# EAGLE board CapstonePCB_Board (EAGLE 9.6.2)
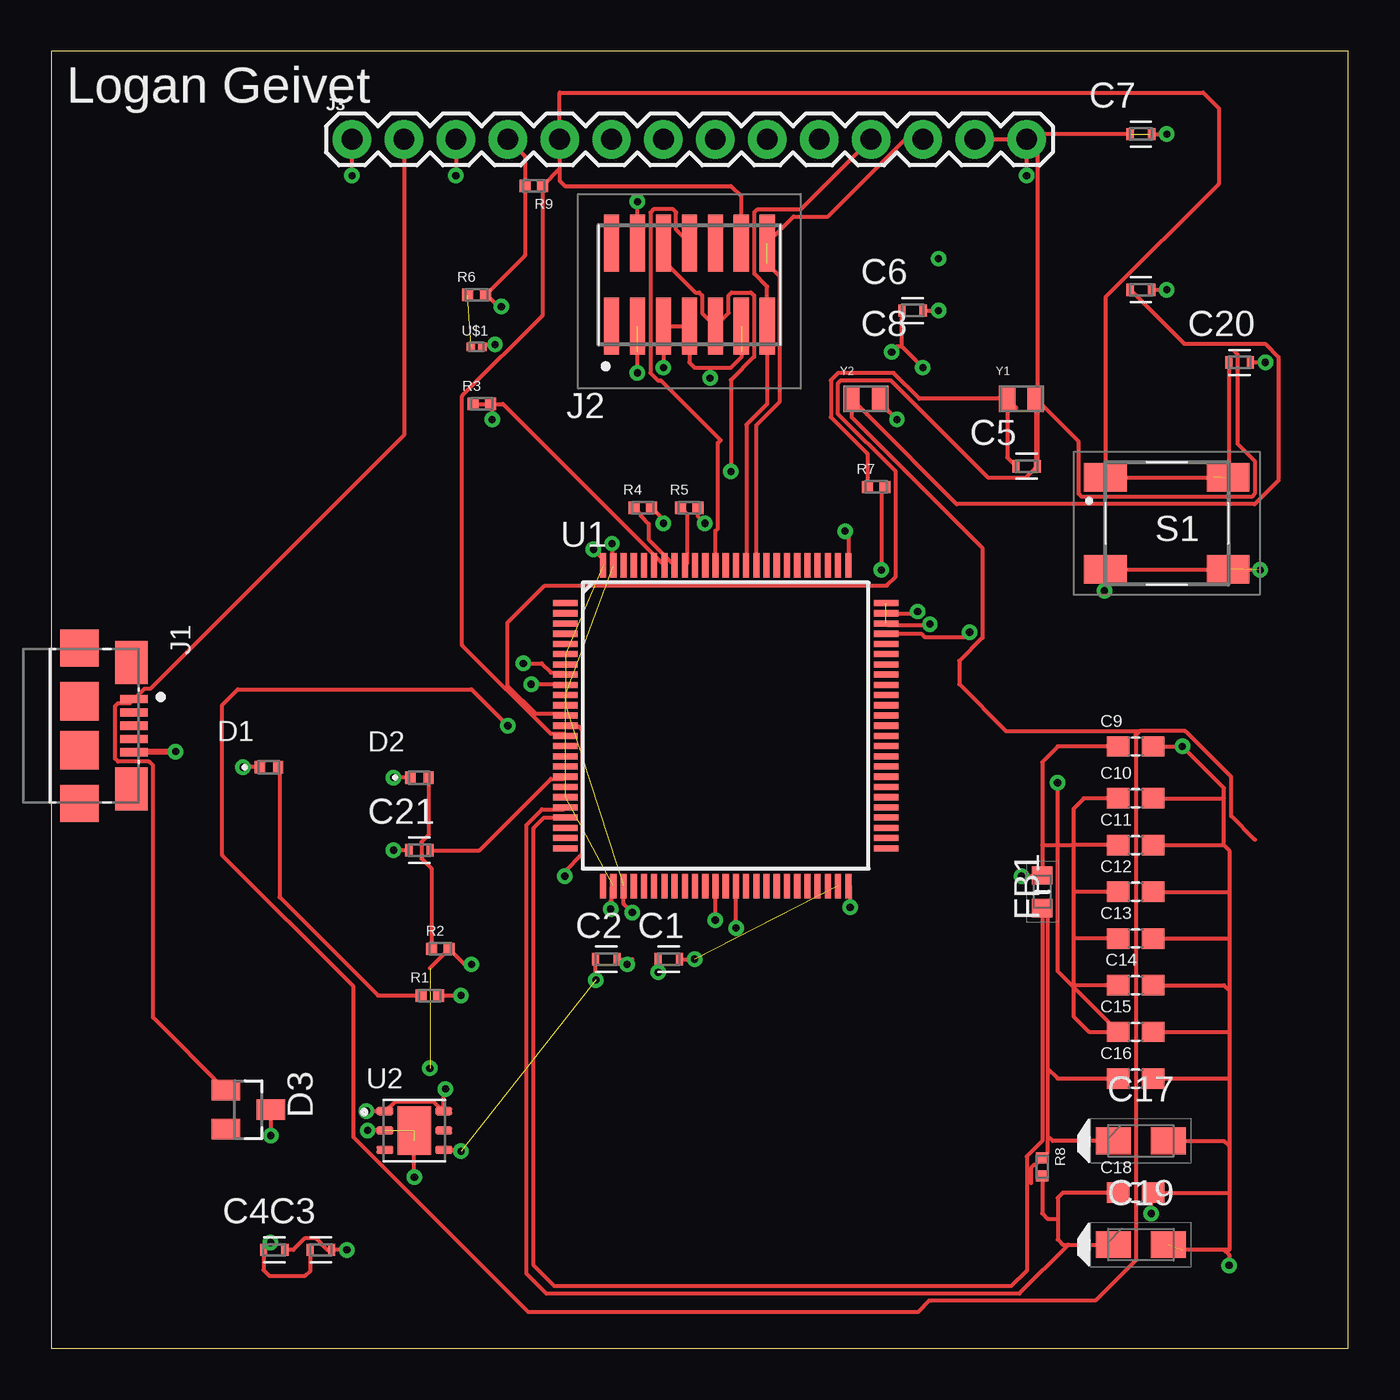
[diagram p0: board, top side]
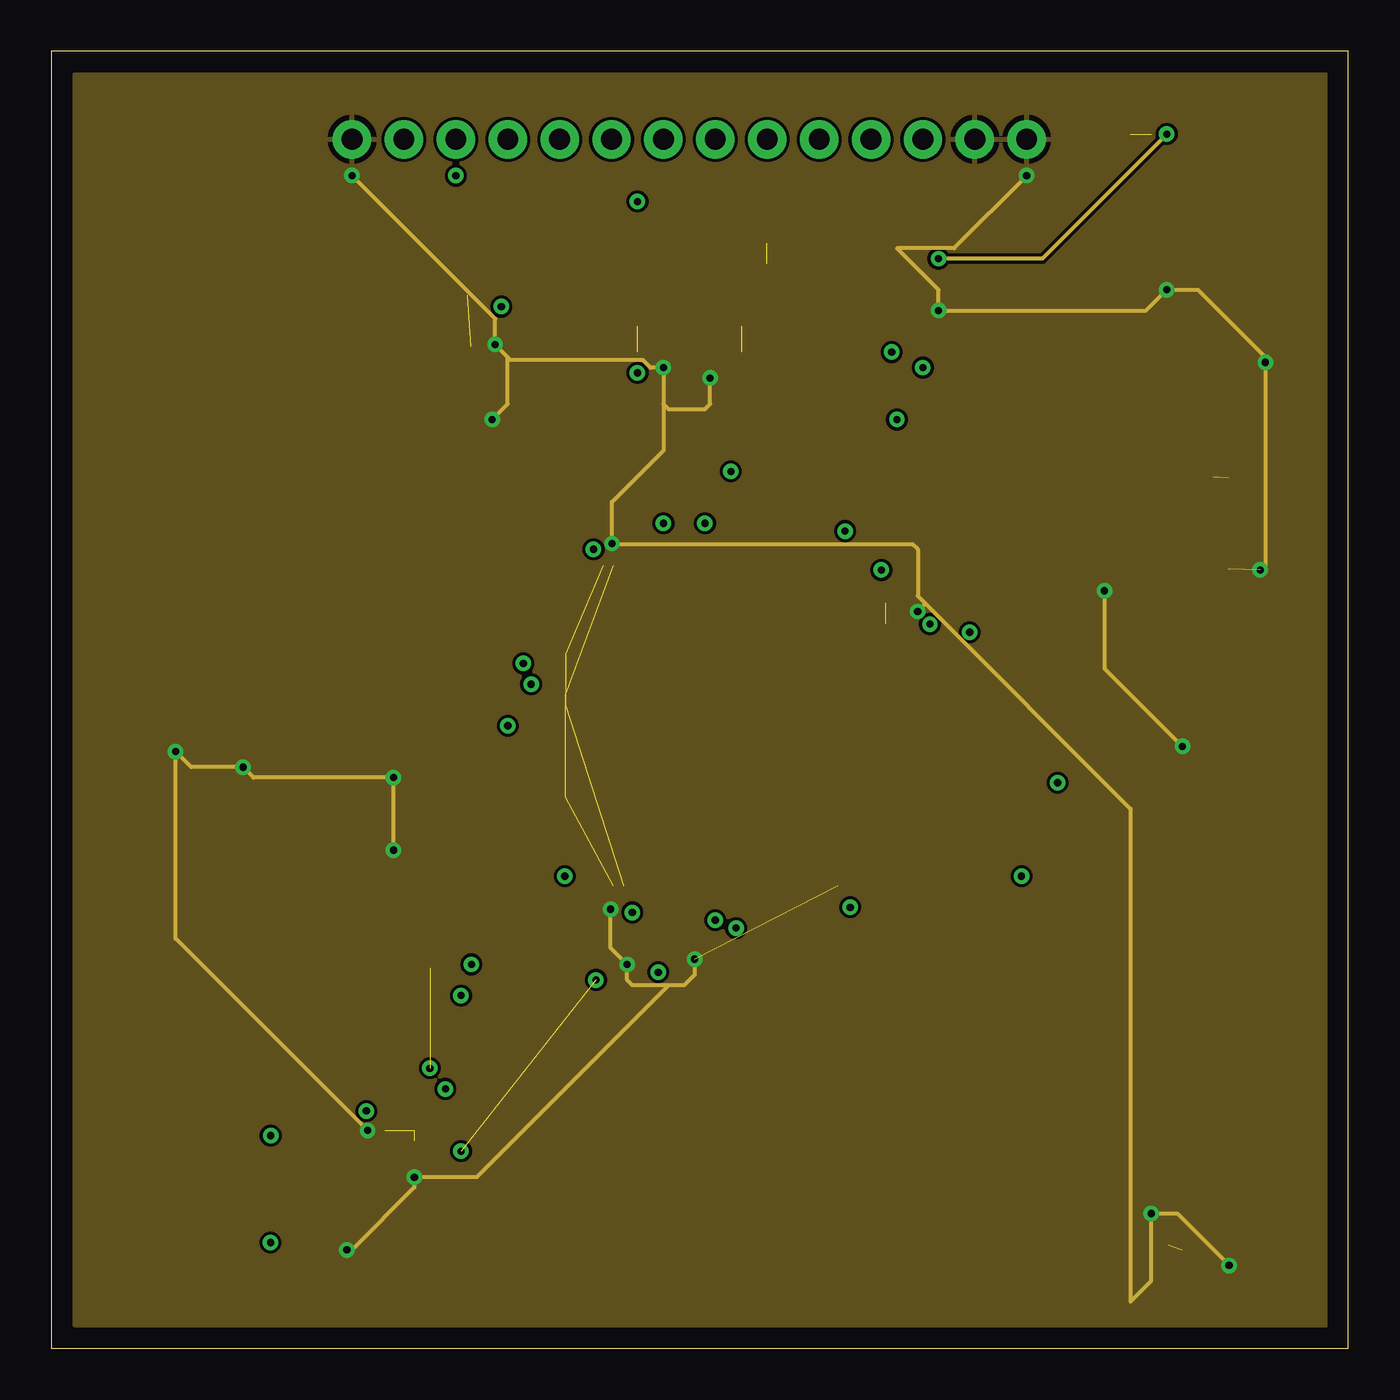
[diagram p1: board, inner layer Route2]
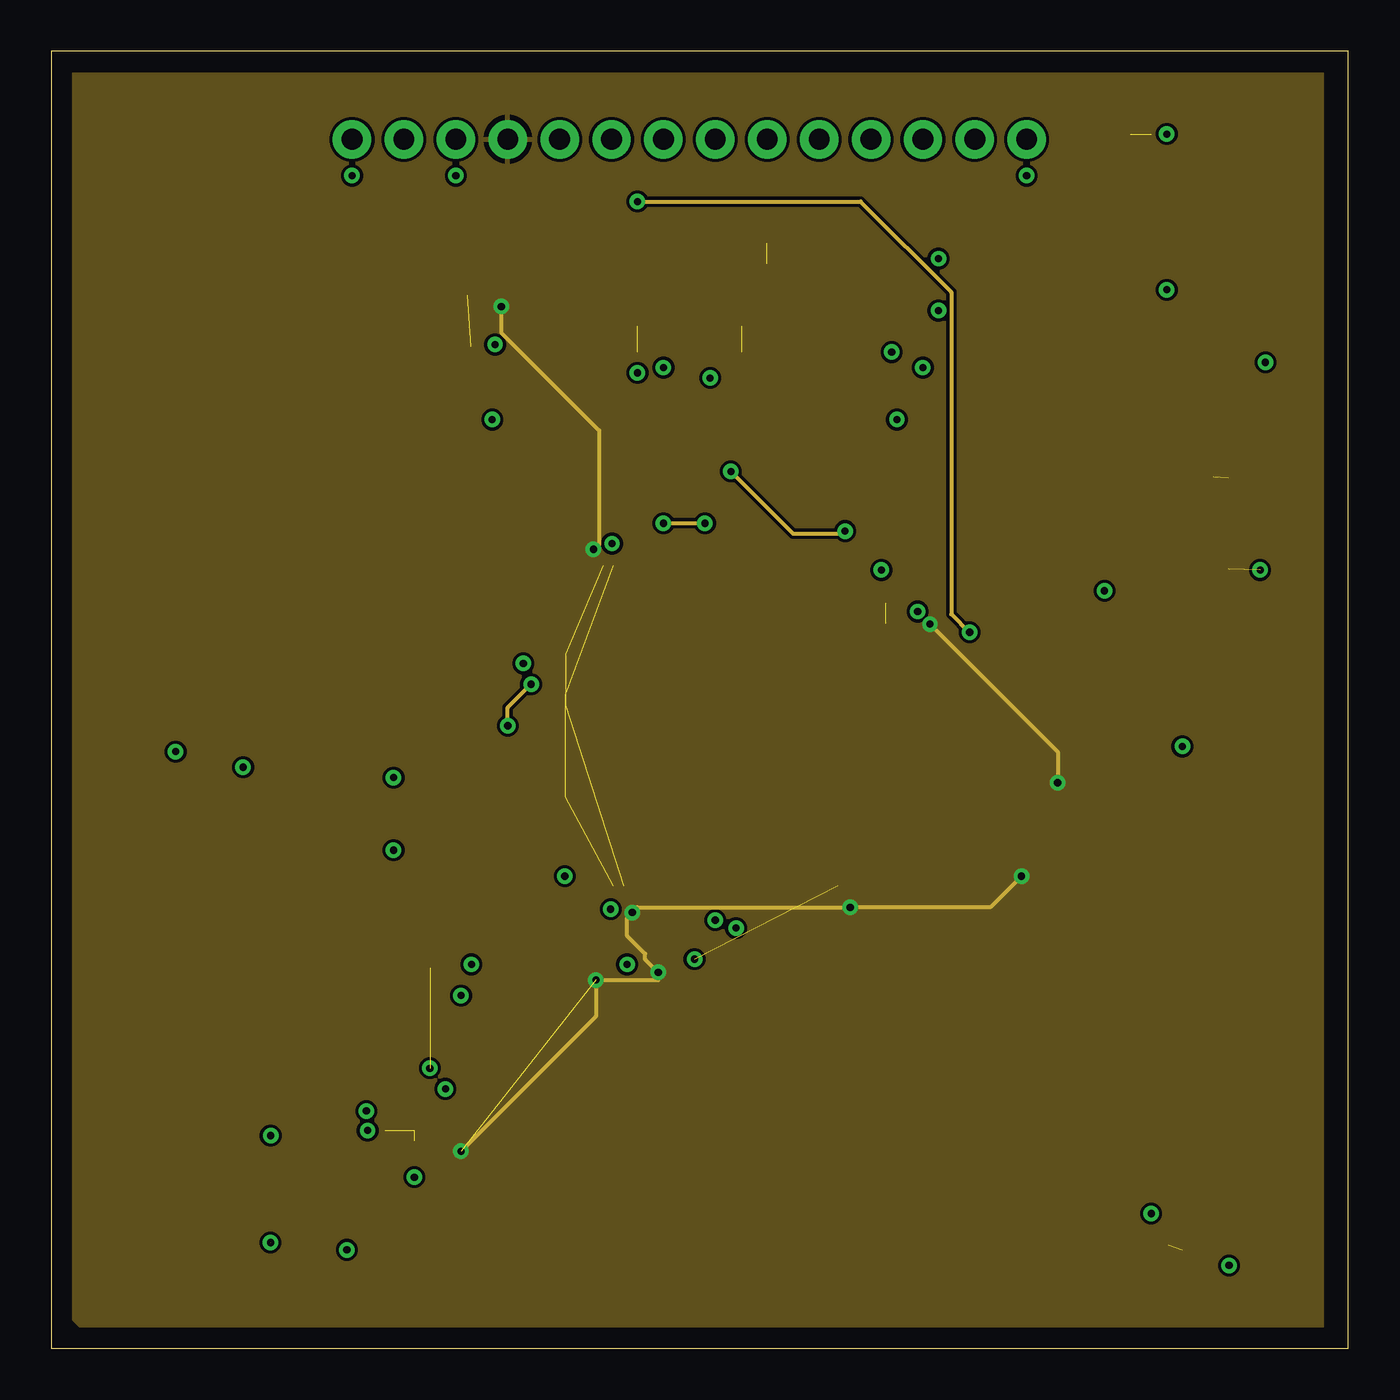
[diagram p2: board, inner layer Route15]
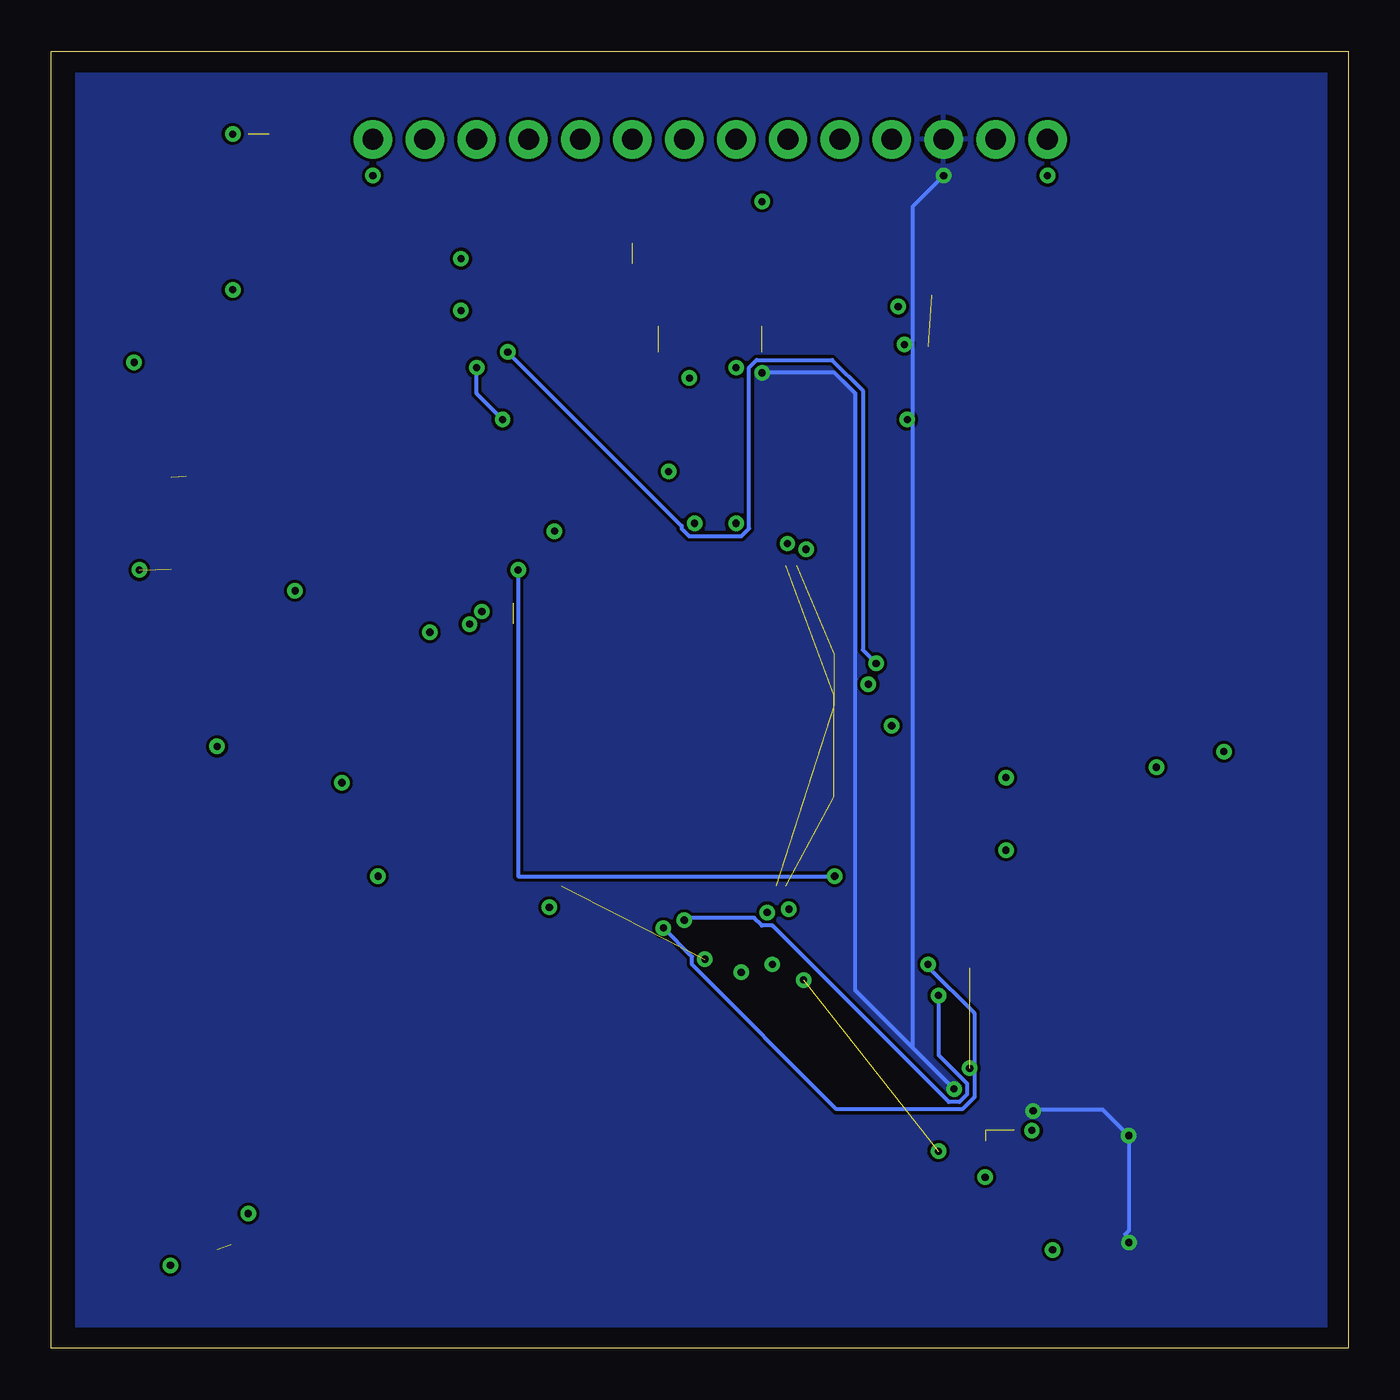
[diagram p3: board, bottom side, seen from below]

Size 63.5 x 63.5 mm. Coordinates in mm from the lower left corner, seen from the top.
Outline: 0,0 63.5,0 63.5,63.5 0,63.5 0,0
Copper layers (1+2*15+16): Top 0.035mm / dielectric 1.5mm / Route2 0.035mm / dielectric 0.15mm / Route15 0.035mm / dielectric 0.2mm / Bottom 0.035mm
Design rules "default *": minimum track width 8mil, minimum drill 0.35mm, track to track 6mil, track to pad 6mil, pad to pad 6mil, via to via 6mil, smd to smd 6mil, copper to edge 40mil, drill to drill 6mil, minimum pad ring 10mil, minimum via ring 8mil, stop-mask expansion 4mil, vias tented up to drill 0mil, thermal gap 10mil

## Footprints (pad centres in the part's own frame; a part is rotated, then mirrored left to right if it is on the bottom)
CAPC1005X55N = smd 0.35 x 0.6: 1 -0.525,0; 2 0.525,0
CAPC1608X90 = smd 1.1 x 1: 1 -0.85,0; 2 0.85,0
CAPPM3216X180N = smd 1.7 x 1.3: A -1.35,0; C 1.35,0
LED_SML-P11UTT86R = smd 0.5 x 0.6: A 0.45,0; C -0.45,0
SOT23 = smd 1 x 1.4: 1 -0.95,-1.1; 2 0.95,-1.1; 3 0,1.1
BEADC1608X95N = smd 0.9 x 1: 1 -0.8,0; 2 0.8,0
AMPHENOL_10118192-0001LF = smd 0.4 x 1.35: 1 -1.3,0; 2 -0.65,0; 3 0,0; 4 0.65,0; 5 1.3,0 | smd 2.1 x 1.6: SH1 -3.1,-0.125; SH2 3.1,-0.125 | smd 1.8 x 1.9: SH3 -3.8,-2.675; SH6 3.8,-2.675 | smd 1.9 x 1.9: SH4 -1.2,-2.675; SH5 1.2,-2.675
FTSH10701LDVKA = smd 0.74 x 2.79: 1 -3.81,-2.035; 2 -3.81,2.035; 3 -2.54,-2.035; 4 -2.54,2.035; 5 -1.27,-2.035; 6 -1.27,2.035; 7 0,-2.035; 8 0,2.035; 9 1.27,-2.035; 10 1.27,2.035; 11 2.54,-2.035; 12 2.54,2.035; 13 3.81,-2.035; 14 3.81,2.035
1X14 = drill 1.016 pad 1.88: 1 0,0; 2 2.54,0; 3 5.08,0; 4 7.62,0; 5 10.16,0; 6 12.7,0; 7 15.24,0; 8 17.78,0; 9 20.32,0; 10 22.86,0; 11 25.4,0; 12 27.94,0; 13 30.48,0; 14 33.02,0
RESC1005X40N = smd 0.54 x 0.6: 1 -0.432,0; 2 0.432,0
LL3301FF065QJ = smd 2.1 x 1.4: 1 -3,2.25; 2 3,2.25; 3 -3,-2.25; 4 3,-2.25
LQFP100_14X14 = smd 1.2 x 0.3: 1 -7.85,6; 2 -7.85,5.5; 3 -7.85,5; 4 -7.85,4.5; 5 -7.85,4; 6 -7.85,3.5; 7 -7.85,3; 8 -7.85,2.5; 9 -7.85,2; 10 -7.85,1.5; 11 -7.85,1; 12 -7.85,0.5; 13 -7.85,0; 14 -7.85,-0.5; 15 -7.85,-1; 16 -7.85,-1.5; 17 -7.85,-2; 18 -7.85,-2.5; 19 -7.85,-3; 20 -7.85,-3.5; 21 -7.85,-4; 22 -7.85,-4.5; 23 -7.85,-5; 24 -7.85,-5.5; 25 -7.85,-6; 51 7.85,-6; 52 7.85,-5.5; 53 7.85,-5; 54 7.85,-4.5; 55 7.85,-4; 56 7.85,-3.5; 57 7.85,-3; 58 7.85,-2.5; 59 7.85,-2; 60 7.85,-1.5; 61 7.85,-1; 62 7.85,-0.5; 63 7.85,0; 64 7.85,0.5; 65 7.85,1; 66 7.85,1.5; 67 7.85,2; 68 7.85,2.5; 69 7.85,3; 70 7.85,3.5; 71 7.85,4; 72 7.85,4.5; 73 7.85,5; 74 7.85,5.5; 75 7.85,6 | smd 0.3 x 1.2: 26 -6,-7.85; 27 -5.5,-7.85; 28 -5,-7.85; 29 -4.5,-7.85; 30 -4,-7.85; 31 -3.5,-7.85; 32 -3,-7.85; 33 -2.5,-7.85; 34 -2,-7.85; 35 -1.5,-7.85; 36 -1,-7.85; 37 -0.5,-7.85; 38 0,-7.85; 39 0.5,-7.85; 40 1,-7.85; 41 1.5,-7.85; 42 2,-7.85; 43 2.5,-7.85; 44 3,-7.85; 45 3.5,-7.85; 46 4,-7.85; 47 4.5,-7.85; 48 5,-7.85; 49 5.5,-7.85; 50 6,-7.85; 76 6,7.85; 77 5.5,7.85; 78 5,7.85; 79 4.5,7.85; 80 4,7.85; 81 3.5,7.85; 82 3,7.85; 83 2.5,7.85; 84 2,7.85; 85 1.5,7.85; 86 1,7.85; 87 0.5,7.85; 88 0,7.85; 89 -0.5,7.85; 90 -1,7.85; 91 -1.5,7.85; 92 -2,7.85; 93 -2.5,7.85; 94 -3,7.85; 95 -3.5,7.85; 96 -4,7.85; 97 -4.5,7.85; 98 -5,7.85; 99 -5.5,7.85; 100 -6,7.85
SON95P300X300X100-7N = smd 0.84 x 0.4: 1 -1.435,0.95; 2 -1.435,0; 3 -1.435,-0.95; 4 1.435,-0.95; 5 1.435,0; 6 1.435,0.95 | smd 1.625 x 2.365: 7 0,0
CAPC0603X39N = smd 0.41 x 0.42: 1 -0.278,0; 2 0.278,0
XTAL_ECS-.327-12.5-12QS-TR = smd 0.8 x 1.3: 1 -0.7,0; 2 0.7,0

## Placement (x,y rotation side)
C1  CC0402JRNPO9BN200  [CAPC1005X55N]  30.23,19.05 0 top
C2  CC0402JRNPO9BN200  [CAPC1005X55N]  27.18,19.05 0 top
C3  CC0402JRNPO9BN200  [CAPC1005X55N]  13.21,4.83 0 top
C4  CC0402JRNPO9BN200  [CAPC1005X55N]  10.92,4.83 0 top
C5  CC0402JRNPO9BN200  [CAPC1005X55N]  47.75,43.18 0 top
C6  CC0402JRNPO9BN200  [CAPC1005X55N]  42.16,50.8 0 top
C7  CC0402JRNPO9BN200  [CAPC1005X55N]  53.34,59.44 0 top
C8  CC0402JRNPO9BN200  [CAPC1005X55N]  53.34,51.82 0 top
C9  CC0603KRX5R7BB105  [CAPC1608X90]  53.09,29.46 0 top
C10  CC0603KRX5R7BB105  [CAPC1608X90]  53.09,26.92 0 top
C11  CC0603KRX5R7BB105  [CAPC1608X90]  53.09,24.64 0 top
C12  CC0603KRX5R7BB105  [CAPC1608X90]  53.09,22.35 0 top
C13  CC0603KRX5R7BB105  [CAPC1608X90]  53.09,20.07 0 top
C14  CC0603KRX5R7BB105  [CAPC1608X90]  53.09,17.78 0 top
C15  CC0603KRX5R7BB105  [CAPC1608X90]  53.09,15.49 0 top
C16  CC0603KRX5R7BB105  [CAPC1608X90]  53.09,13.21 0 top
C17  TAJA105K016RNJ  [CAPPM3216X180N]  53.34,10.16 0 top
C18  CC0603KRX5R7BB105  [CAPC1608X90]  53.09,7.62 0 top
C19  TAJA105K016RNJ  [CAPPM3216X180N]  53.34,5.08 0 top
C20  CC0402KRX7R7BB104  [CAPC1005X55N]  58.17,48.26 0 top
C21  CC0402JRNPO9BN200  [CAPC1005X55N]  18.03,24.38 0 top
D1  SML-P12MTT86  [LED_SML-P11UTT86R]  10.67,28.45 0 top
D2  SML-P12MTT86  [LED_SML-P11UTT86R]  18.03,27.94 0 top
D3  BAT54  [SOT23]  9.65,11.68 270 top
FB1  BK1608HS601-T  [BEADC1608X95N]  48.51,22.35 90 top
J1  10118192-0001LF  [AMPHENOL_10118192-0001LF]  4.06,30.48 270 top
J2  FTSH-107-01-L-DV-K-A  [FTSH10701LDVKA]  31.24,52.07 0 top
J3  [1X14]  14.73,59.18 0 top
R1  RC0402FR-071KL  [RESC1005X40N]  18.54,17.27 0 top
R2  RC0402FR-071KL  [RESC1005X40N]  19.05,19.56 0 top
R3  RC0402FR-071KL  [RESC1005X40N]  21.08,46.23 0 top
R4  RC0402FR-071KL  [RESC1005X40N]  28.96,41.15 0 top
R5  RC0402FR-071KL  [RESC1005X40N]  31.24,41.15 0 top
R6  RC0402FR-071KL  [RESC1005X40N]  20.83,51.56 0 top
R7  RC0402FR-071KL  [RESC1005X40N]  40.39,42.16 0 top
R8  RC0402FR-071KL  [RESC1005X40N]  48.51,8.89 270 top
R9  RC0402FR-071KL  [RESC1005X40N]  23.62,56.9 180 top
S1  LL3301FF065QJ  [LL3301FF065QJ]  54.61,40.39 0 top
U1  STM32L476VCT6  [LQFP100_14X14]  33.02,30.48 0 top
U2  LD39050PU33R  [SON95P300X300X100-7N]  17.78,10.67 0 top
U$1  19-213-R6C-AP1Q2B/3T  [CAPC0603X39N]  20.83,49.02 0 top
Y1  ECS-.327-12.5-12QS-TR  [XTAL_ECS-.327-12.5-12QS-TR]  47.5,46.48 0 top
Y2  ECS-.327-12.5-12QS-TR  [XTAL_ECS-.327-12.5-12QS-TR]  39.88,46.48 0 top

## Library data of the parts
C1-C8 C21 = ce-capstone; DESCRIPTION: 20pF ±5% 50V Ceramic Capacitor C0G, NP0 0402 _1005 Metric_; DIGI-KEY_PART_NUMBER: 311-1417-1-ND; DIGI-KEY_PURCHASE_URL: https://www.digikey.com/product-detail/en/yageo/CC0402JRNPO9BN200/311-1417-1-ND/2833723?utm_source=snapeda&utm_medium=aggregator&utm_campaign=symbol; MF: Yageo; MP: CC0402JRNPO9BN200; PACKAGE: 0402 Yageo
C9-C16 C18 = ce-capstone; DESCRIPTION: 1µF ±10% 16V Ceramic Capacitor X5R 0603 _1608 Metric_; DIGI-KEY_PART_NUMBER: 311-1444-1-ND; DIGI-KEY_PURCHASE_URL: https://www.digikey.com/product-detail/en/yageo/CC0603KRX5R7BB105/311-1444-1-ND/2833750?utm_source=snapeda&utm_medium=aggregator&utm_campaign=symbol; MF: Yageo; MP: CC0603KRX5R7BB105; PACKAGE: 0603 Yageo
C17 C19 = ce-capstone; ALLIED_NUMBER: 70474975; ALLIED_PRICE-STOCK: https://www.alliedelec.com/avx-taja105k016r/70474975/; DESCRIPTION: Capacitor tantalum TAJ 1206 1uF 16V AVX 1uF SMD Solid MnO2 Tantalum Electrolytic Capacitor, 16 V dc +/-10%, TAJ Series; HEIGHT: 1.8mm; MANUFACTURER_NAME: AVX; MANUFACTURER_PART_NUMBER: TAJA105K016RNJ; MOUSER_PART_NUMBER: 581-TAJA105K016RNJ; MOUSER_PRICE-STOCK: https://www.mouser.com/Search/Refine.aspx?Keyword=581-TAJA105K016R; RS_PART_NUMBER: 6992804P; RS_PRICE-STOCK: http://uk.rs-online.com/web/p/products/6992804P
C20 = ce-capstone; DESCRIPTION: 0.1µF ±10% 16V Ceramic Capacitor X7R 0402 _1005 Metric_; DIGI-KEY_PART_NUMBER: 311-1338-1-ND; DIGI-KEY_PURCHASE_URL: https://www.digikey.com/product-detail/en/yageo/CC0402KRX7R7BB104/311-1338-1-ND/2103122?utm_source=snapeda&utm_medium=aggregator&utm_campaign=symbol; MF: Yageo; MP: CC0402KRX7R7BB104; PACKAGE: 0402 Yageo
D1 D2 = ce-capstone; AVAILABILITY: Unavailable; DESCRIPTION: Green 572nm LED Indication - Discrete 2V 0402 _1006 Metric_; MF: Rohm; MP: SML-P12MTT86; PACKAGE: 0402 Rohm; PRICE: None
D3 U$1 = ce-capstone
FB1 = ce-capstone; DESCRIPTION: Ferrite Chip Bead(Lead Free); HEIGHT: 0.95mm; MANUFACTURER_NAME: Taiyo Yuden; MANUFACTURER_PART_NUMBER: BK1608HS601-T
J1 = ce-capstone; AVAILABILITY: Unavailable; DESCRIPTION: USB - micro B USB 2.0 Receptacle Connector 5 Position Surface Mount, Right Angle; MF: Amphenol ICC; MP: 10118192-0001LF; PACKAGE: None; PRICE: None
J2 = ce-capstone; DESCRIPTION: Headers & Wire Housings .050" Micro Terminal Strip; HEIGHT: 5.97mm; MANUFACTURER_NAME: SAMTEC; MANUFACTURER_PART_NUMBER: FTSH-107-01-L-DV-K-A; MOUSER_PART_NUMBER: 200-FTSH10701LDVKA; MOUSER_PRICE-STOCK: https://www.mouser.com/Search/Refine.aspx?Keyword=200-FTSH10701LDVKA
J3 = SparkFun-Connectors
R1-R9 = ce-capstone; DESCRIPTION: 510 Ohms ±1% 0.063W, 1/16W Chip Resistor 0402 _1005 Metric_ Moisture Resistant Thick Film; DIGI-KEY_PART_NUMBER: 311-510LRCT-ND; DIGI-KEY_PURCHASE_URL: https://www.digikey.com/product-detail/en/yageo/RC0402FR-07510RL/311-510LRCT-ND/729579?utm_source=snapeda&utm_medium=aggregator&utm_campaign=symbol; MF: Yageo; MP: RC0402FR-07510RL; PACKAGE: 1005 Panasonic Electronic Components
S1 = ce-capstone; DESCRIPTION: Pushbutton Switches 50mA 12VDC F065 7.0mm J-Lead; HEIGHT: 7.3mm; MANUFACTURER_NAME: E-Switch; MANUFACTURER_PART_NUMBER: LL3301FF065QJ; MOUSER_PART_NUMBER: 612-LL3301FF065QJ; MOUSER_PRICE-STOCK: https://www.mouser.com/Search/Refine.aspx?Keyword=612-LL3301FF065QJ
U1 = ce-capstone; FARNELL: 2518171; FLASH: 256kB; SRAM: 128kB
U2 = ce-capstone; AVAILABILITY: Unavailable; DESCRIPTION: Linear Voltage Regulator IC 1 Output 500mA 6-DFN _3x3_; MF: STMicroelectronics; MP: LD39050PU33R; PACKAGE: DFN-6 STMicroelectronics; PRICE: None
Y1 Y2 = ce-capstone; AVAILABILITY: Unavailable; DESCRIPTION: 32.768kHz ±20ppm Crystal 12.5pF 90 kOhms 2-SMD, No Lead; MF: ECS Inc.; MP: ECS-.327-12.5-12QS-TR; PACKAGE: SMD-2 ECS International; PRICE: None

## Nets
3.3V: R4.2 R5.2
3V3: C1.1 C2.1 C9.1 C10.1 C11.1 C12.1 C13.1 C14.1 C15.1 FB1.2 J3.4 R6.2 R9.2 U1.6 U1.11 U1.28 U1.50 U1.73 U1.75 U1.100 U2.4
5V: C3.1 C4.1 D3.3 J2.3 J3.3 U2.1 U2.6
5V_IN: D3.1 J1.1 J3.2
BOOT0: J3.6
GND: C1.2 C2.2 C3.2 C4.2 C6.2 C8.2 C9.2 C10.2 C11.2 C12.2 C13.2 C14.2 C15.2 C16.2 C17.C C18.2 C19.C C20.2 C21.1 D1.C D2.C J1.5 J2.5 J2.7 J2.11 J3.1 J3.13 J3.14 R3.2 S1.3 S1.4 U1.10 U1.19 U1.20 U1.27 U1.49 U1.74 U1.99 U2.2 U2.7 U$1.2
I2C1_SCL: J3.8
I2C1_SDA: J3.7
LED_G: J3.10
LED_R: J3.9
N$1: R2.2 U1.39
N$2: R1.2 U1.37
N$3: D1.A R1.1
N$4: D2.A R2.1
N$5: R5.1 U1.92
N$6: R6.1 U$1.1
N$7: R3.1 U1.94
N$8: R4.1 U1.93
N$10: C5.1 R7.1 Y1.1
N$20: C21.2 U1.18
NRST: C20.1 J2.12 J3.5 R9.1 S1.1 S1.2 U1.14
PC14-OSC32-IN: C6.1 U1.8 Y2.2
PC15-OSC32-OUT: C8.1 U1.9 Y2.1
PH0-OSC-IN: C5.2 C7.1 C7.2 U1.12 Y1.2
PH1-OSC-OUT: R7.2 U1.13
SWCLK: J2.6 J2.9 U1.76
SWDIO: J2.4 U1.72
SWO: J2.8 U1.89
USART_RX: J2.13 J3.11 U1.86
USART_TX: J2.14 J3.12 U1.85
VDDA: C16.1 C17.A FB1.1 R8.1 U1.22
VREF_PLUS: C18.1 C19.A R8.2 U1.21

## Tracks (layer width: path | path; a pad name or v marks a point on that pad's centre or on a via)
3.3V  (via drill 0.35)
  Top 0.203: R4.2 29.97,40.56 v29.97,40.39 | v32,40.39 31.67,40.72 R5.2
  Route15 0.203: v29.97,40.39 v32,40.39
3V3  (via drill 0.35)  (5 unrouted)
  Top 0.203: C10.1 50.55,26.92 50.04,26.42 50.04,24.64 | 50.04,24.64 50.04,22.35 | 50.04,22.35 50.04,20.07 | 50.04,20.07 50.04,17.78 | 50.04,17.78 50.04,16.26 50.8,15.49 C15.1 49.27,18.46 v49.27,27.69 | C11.1 50.04,24.64 | C12.1 50.04,22.35 | C13.1 50.04,20.07 | C14.1 50.04,17.78 | C9.1 49.28,29.46 48.51,28.7 48.51,24.64 | 48.51,24.64 50.04,24.64 | 48.51,24.64 FB1.2 48.48,23.11 v47.5,23.11 | U1.50 39.12,22.63 v39.12,21.59 | U2.4 20,9.72 v20.07,9.65 | v29.72,18.41 29.7,18.43 C1.1 | v26.67,18.03 26.65,18.05 C2.1 | v28.45,21.34 28.02,21.76 U1.28 | U1.73 40.97,35.38 42.95,35.38 v43.02,35.45 | J3.4 23.19,58.34 R9.2 23.19,53.49 R6.2 21.34,51.56 21.91,50.99 v22.04,50.99 | v26.55,39.12 27.02,38.64 U1.100
  Route15 0.203: v20.07,9.65 26.67,16.26 v26.67,18.03 29.72,18.03 v29.72,18.41 29.08,19.05 29.08,19.31 28.19,20.2 28.19,21.08 v28.45,21.34 28.7,21.59 v39.12,21.59 45.97,21.59 v47.5,23.11 | v43.02,35.45 49.27,29.2 v49.27,27.69 | v22.04,50.99 22.04,49.72 26.82,44.94 26.82,39.37 26.57,39.12 v26.55,39.12
  pour Route15: 1.02,62.48 1.02,1.52 1.52,1.02 62.23,1.02 62.23,62.48 0.76,62.48 0.51,62.23 0.76,62.23
5V  (via drill 0.35)  (2 unrouted)
  Top 0.203: 10.94,11.87 D3.3 v10.75,10.41 | 10.75,5.18 C4.1 10.4,3.83 10.67,3.56 12.45,3.56 12.7,3.81 12.7,4.81 C3.1 | v19.3,12.7 19.21,12.61 U2.6 19.18,11.62 18.7,12.1 16.86,12.1 16.38,11.62 U2.1 v15.44,11.62 v15.43,11.62 | v28.7,47.75 28.7,48.77 | J3.3 v19.81,57.4
  Bottom 0.203: v28.7,47.75 25.15,47.75 24.13,46.74 24.13,17.53 v19.3,12.7 21.34,14.73 21.34,55.88 v19.81,57.4 | v10.74,5.18 10.92,5.36 10.92,5.59 10.75,5.76 v10.75,10.41 12.02,11.68 15.37,11.68 v15.43,11.62
  pour Bottom: 1.02,62.48 1.02,1.02 62.23,1.02 62.23,62.48
5V_IN
  Top 0.203: J3.2 17.27,44.7 4.84,32.28 4.56,32.28 4.18,31.89 J1.1 3.87,31.58 3.28,31.58 3.13,31.43 3.13,28.88 3.28,28.73 4.8,28.73 4.99,28.54 4.99,16.19 D3.1
GND  (via drill 0.35)  (10 unrouted)
  Top 0.203: 33.78,48.77 33.78,48.51 33.27,48.01 32.26,48.01 | 32.26,48.01 31.5,48.01 31.24,48.26 J2.7 J2.5 v29.97,48.01 | J1.5 4.09,29.21 | 5.84,29.21 v6.1,29.21 | C9.2 v55.37,29.46 57.4,27.43 57.4,26.92 | C10.2 57.4,26.92 | C11.2 57.4,24.64 | 57.4,24.64 57.4,26.92 | 57.4,24.64 57.66,24.38 57.66,22.35 | 57.66,22.35 57.66,20.07 | 57.66,20.07 57.66,17.53 | 57.66,17.53 57.66,15.49 | 57.66,15.49 57.66,13.21 | 57.66,13.21 57.66,9.91 | 57.66,9.91 57.66,7.62 | 57.66,7.62 57.66,4.83 57.4,4.83 | 57.4,4.83 55.37,4.83 | C12.2 57.66,22.35 | C13.2 57.66,20.07 | C14.2 57.4,17.78 57.66,17.53 | C15.2 57.66,15.49 | C16.2 57.66,13.21 | C17.C 57.4,10.16 57.66,9.91 | 57.66,7.62 C18.2 53.85,7.53 v53.85,6.6 | 57.4,4.83 57.66,4.57 v57.66,4.06 | U1.74 42.33,35.98 v42.42,36.07 | 32.26,48.01 v32.26,47.5 | v27.46,39.39 27.46,38.39 U1.99 | C1.2 v31.5,19.05 | C2.2 28.45,19.05 v28.19,18.8 | v17.78,8.38 17.78,10.16 | v14.48,4.83 C3.2 13.52,4.83 12.96,5.38 12.4,5.38 11.85,4.83 C4.2 | U2.2 v15.49,10.67 | C6.2 v43.43,50.8 | C8.2 v54.61,51.82 | v59.44,48.26 C20.2 | v59.18,38.1 51.65,38.1 S1.3 51.61,37.13 v51.56,37.08 | v47.75,57.4 J3.14 J3.13 | D1.C v9.4,28.45 | D2.C v16.76,27.94 | C21.1 v16.76,24.38 | U$1.2 21.22,49.13 v21.73,49.13 | v14.73,57.4 J3.1 | R3.2 21.59,46.15 v21.59,45.47 | v27.39,21.5 27.39,21.89 27.42,21.93 27.42,22.53 U1.27
  Top 0.305: 4.09,29.21 5.84,29.21
  Route2 0.203: v57.66,4.06 55.12,6.6 v53.85,6.6 53.85,3.3 52.83,2.29 52.83,26.42 42.8,36.45 | 29.97,46.23 v29.97,48.01 29.34,48.01 28.96,48.38 22.48,48.38 v21.73,49.13 | 29.97,46.23 30.23,45.97 32,45.97 32.26,46.23 v32.26,47.5 | 29.97,46.23 29.97,43.94 27.46,41.43 v27.46,39.39 27.48,39.37 42.16,39.37 42.42,39.12 42.42,36.83 42.8,36.45 | 42.8,36.45 v42.42,36.07 | v31.5,19.05 31.5,18.29 30.99,17.78 30.23,17.78 | 30.23,17.78 28.45,17.78 28.19,18.03 v28.19,18.8 27.39,19.6 v27.39,21.5 | 30.23,17.78 20.83,8.38 v17.78,8.38 17.78,7.87 14.73,4.83 v14.48,4.83 | v15.49,10.67 6.1,20.07 v6.1,29.21 6.86,28.45 v9.4,28.45 9.91,27.94 v16.76,27.94 v16.76,24.38 | v59.18,38.1 59.44,38.35 v59.44,48.26 59.44,48.51 56.13,51.82 v54.61,51.82 53.59,50.8 v43.43,50.8 43.43,51.82 41.4,53.85 44.2,53.85 v47.75,57.4 | v51.56,37.08 51.56,33.27 v55.37,29.46 | v21.73,49.13 21.73,50.4 v14.73,57.4 | v21.73,49.13 22.35,48.51 22.35,46.23 v21.59,45.47
  pour Route2: 1.02,62.23 1.02,1.27 1.27,1.02 62.48,1.02 62.48,62.48 1.27,62.48
N$1  (via drill 0.35)  (1 unrouted)
  Top 0.203: 18.54,18.62 R2.2 20.24,18.8 v20.57,18.8 | v33.53,20.57 U1.39
  Bottom 0.203: v33.53,20.57 32.13,19.17 32.13,18.79 25.05,11.71 18.89,11.71 18.32,12.29 18.32,16.42 20.57,18.67 v20.57,18.8
  other vias: 18.54,13.72
N$2  (via drill 0.35)
  Top 0.203: R1.2 v20.07,17.27 | v32.51,20.96 U1.37
  Bottom 0.203: v20.07,17.27 20.07,14.36 18.67,12.96 18.67,12.44 19.04,12.07 19.57,12.07 28.2,20.7 28.71,20.7 29.09,21.08 32.51,21.08 v32.51,20.96
N$3
  Top 0.203: D1.A 11.18,28.39 11.18,22.1 16,17.27 R1.1
N$4
  Top 0.203: R2.1 18.62,23.49 18.13,23.98 18.13,24.79 18.48,25.14 D2.A
N$5
  Top 0.203: U1.92 31.12,38.43 31.12,40.84 R5.1
N$6  (1 unrouted)
N$7
  Top 0.203: U1.94 22.12,46.23 R3.1
N$8
  Top 0.203: R4.1 28.86,40.81 28.86,40.74 29.25,40.36 29.25,39.6 U1.93
N$10
  Top 0.203: Y1.1 47.23,46.05 47.23,46.01 | Y1.1 46.8,43.61 C5.1 | Y1.1 42.49,46.48 41.23,47.74 38.52,47.74 38.17,47.38 38.17,45.58 39.95,43.79 R7.1
N$20
  Top 0.203: U1.18 25.07,27.88 24.46,27.88 20.96,24.38 C21.2
NRST  (1 unrouted)
  Top 0.203: 56.9,42.67 56.86,42.64 S1.1 51.61,51.45 57.15,56.98 57.15,60.71 56.39,61.47 24.89,61.47 J3.5 | J3.5 24.89,57.15 25.15,56.9 33.27,56.9 33.78,56.39 J2.12 | C20.1 57.64,42.67 S1.2 | J3.5 24.89,57.73 R9.1 24.05,50.56 20.13,46.63 20.13,34.41 24.46,30.08 25.07,30.08 U1.14
PC14-OSC32-IN  (via drill 0.35)
  Top 0.203: Y2.2 40.58,46.29 v41.4,45.47 | v42.67,48.01 41.64,49.04 | 41.64,49.04 C6.1 | 41.64,49.04 41.42,49.04 v41.15,48.77 | U1.8 25.07,33.08 24.46,33.08 24.01,33.53 v23.11,33.53
  Bottom 0.203: v41.4,45.47 42.67,46.74 v42.67,48.01 | v41.15,48.77 32.64,40.26 32.64,40.12 32.27,39.75 29.71,39.75 29.33,40.13 29.33,48.01 28.96,48.38 25.27,48.38 23.77,46.88 23.77,34.19 v23.11,33.53
PC15-OSC32-OUT  (via drill 0.35)
  Top 0.203: C8.1 55.46,49.17 59.42,49.17 60.07,48.52 60.07,42.48 58.91,41.33 44.32,41.33 39.92,45.73 39.92,45.74 Y2.1 39.18,45.58 45.59,39.16 45.59,34.79 44.45,33.65 44.45,32.51 46.74,30.22 53.28,30.22 | 53.28,30.22 55.51,30.22 57.76,27.97 57.76,26.06 58.93,24.89 | 53.28,30.22 53.09,30.03 53.09,4.33 51.11,2.34 42.98,2.34 42.42,1.78 23.36,1.78 14.8,10.34 14.8,17.71 8.38,24.13 8.38,31.5 9.14,32.26 20.57,32.26 v22.35,30.48 | v23.5,32.51 25.14,32.51 U1.9
  Route15 0.203: v22.35,30.48 22.35,31.37 v23.5,32.51
PH0-OSC-IN  (via drill 0.35)  (1 unrouted)
  Top 0.203: C7.2 v54.61,59.44 | 48.28,48.5 C5.2 | C7.1 48.28,59.44 C5.2 | 57.92,48.81 58.07,48.66 58.07,44.28 58.91,43.44 58.91,41.83 58.77,41.68 50.45,41.68 50.31,41.83 50.31,44.37 Y1.2 48.2,43.26 C5.2 | U1.12 25.07,31.08 23.7,31.08 22.35,32.43 22.35,35.53 24.16,37.34 40.89,37.34 41.34,37.79 41.34,42.91 38.52,45.73 38.52,47.24 38.67,47.39 41.08,47.39 45.84,42.63 47.72,42.63 C5.2
  Route2 0.203: v54.61,59.44 48.51,53.34 v43.43,53.34
PH1-OSC-OUT  (via drill 0.35)
  Top 0.203: R7.2 40.64,41.99 v40.64,38.1 | v25.15,23.11 25.15,23.35 26.02,24.23 26.02,30.23 25.83,30.43 25.22,30.43 U1.13
  Bottom 0.203: v40.64,38.1 40.64,23.11 v25.15,23.11
SWCLK  (via drill 0.35)
  Top 0.203: J2.6 29.97,53.25 31.54,51.68 31.72,51.68 31.87,51.53 31.87,50.68 J2.9 33.16,50.68 33.16,51.53 33.31,51.68 34.26,51.68 34.41,51.53 34.41,48.53 33.27,47.4 v33.27,42.93 | v38.86,40 39.02,39.84 U1.76
  Route15 0.203: v33.27,42.93 36.32,39.88 38.86,39.88 v38.86,40
SWDIO  (via drill 0.35)
  Top 0.203: J2.4 v28.7,56.13 | U1.72 42.6,34.98 42.76,34.82 44.73,34.82 v44.96,35.05
  Route15 0.203: v28.7,56.13 39.62,56.13 44.07,51.69 44.07,35.94 v44.96,35.05
SWO
  Top 0.203: U1.89 32.52,40.01 32.64,40.12 32.64,44.32 32.77,44.45 29.84,47.37 29.71,47.37 29.34,47.74 29.34,55.6 29.5,55.75 30.45,55.75 30.6,55.6 30.6,54.75 J2.8
USART_RX
  Top 0.203: U1.86 34.04,38.35 34.04,45.21 35.05,46.23 J2.13 35.05,51.98 34.43,52.6 34.43,55.6 34.58,55.75 36.7,55.75 J3.11
USART_TX  (1 unrouted)
  Top 0.203: U1.85 34.52,45.19 35.68,46.34 35.68,52.46 35.05,53.09 | J2.14 36.34,55.4 38.04,55.4 41.82,59.18 J3.12
VDDA
  Top 0.203: C16.1 49.28,13.21 48.77,13.72 | 48.77,13.72 48.77,21.3 FB1.1 48.51,10.16 47.75,9.4 47.75,3.81 46.99,3.05 24.64,3.05 23.62,4.06 23.62,25.47 24.13,25.98 U1.22 | C17.A 49.02,10.16 48.77,10.41 | 48.77,13.72 48.77,10.41 | 48.77,10.41 48.77,9.58 R8.1 48.17,8.98 48.11,8.98 47.96,8.83 47.96,8.08
VREF_PLUS
  Top 0.203: C18.1 49.53,7.62 49.28,7.37 49.28,6.35 | 49.78,5.08 49.53,5.08 49.28,5.33 49.28,6.35 | C19.A 51.82,5.08 49.78,5.08 | R8.2 48.51,6.6 48.77,6.35 49.28,6.35 | U1.21 25.07,26.38 24.03,26.38 23.27,25.62 23.27,3.66 24.24,2.69 47.4,2.69 49.78,5.08

## Text on the board
tPlace: Logan Geivet